# Altium PCB USV-Central Controller Board.PcbDoc (part 1 of 2)
Units mm, origin at the board's own origin, x right, y up, seen from the top; angles counter-clockwise.
Board outline 150 x 100 mm, 2 copper layers (Top Layer, Bottom Layer); 99 components, 79 nets, 371 pads, 0 vias.
Unrouted connection lines stored in the file: 190.
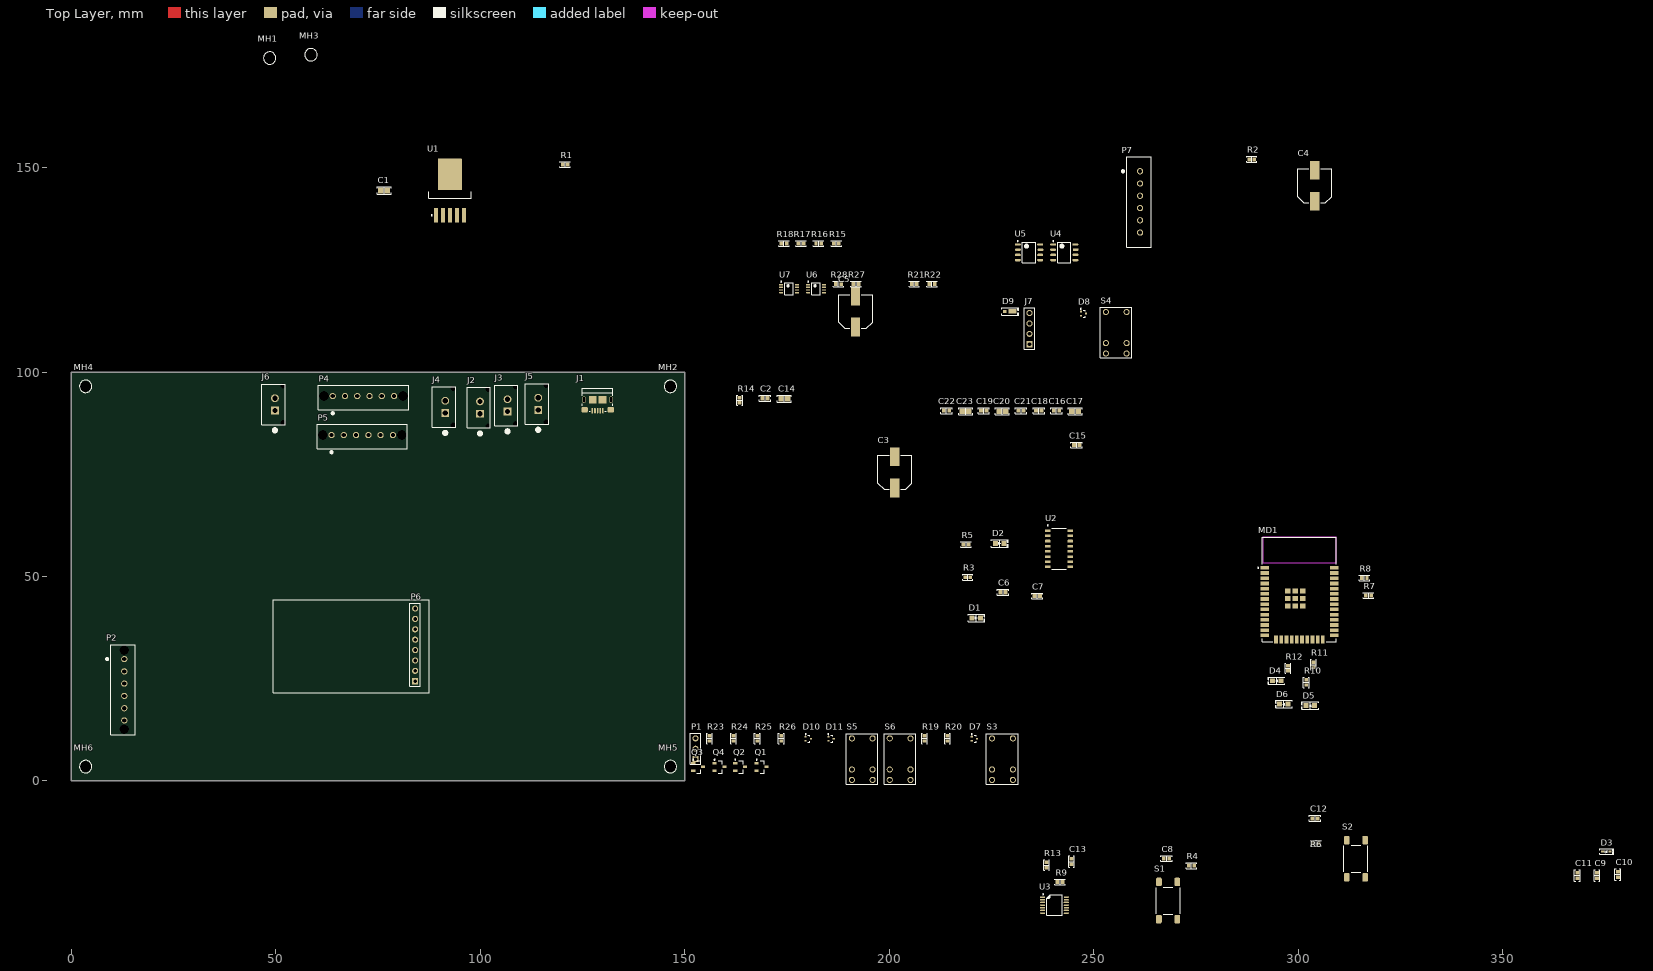
[diagram p0: Top Layer view]
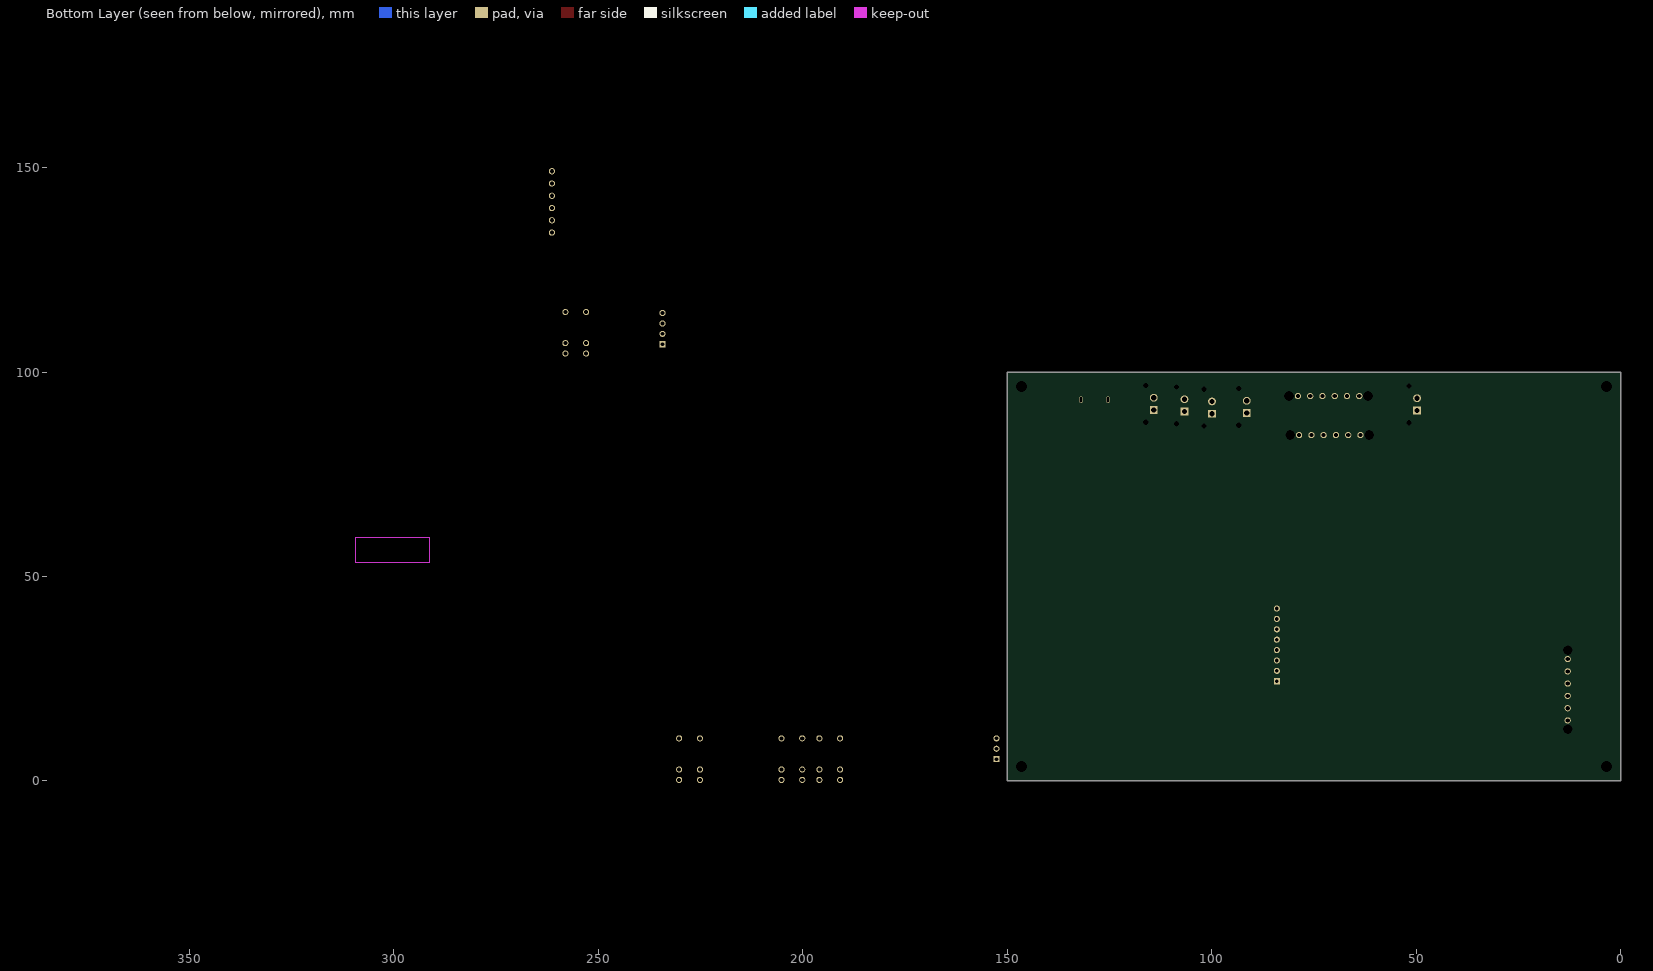
[diagram p1: Bottom Layer view, seen from below]

## Layer stack, top to bottom
Top Solder: solder mask 0.0102, Solder Resist, Dk 3.5
Top Layer: signal copper 0.0356
Dielectric 1: dielectric 0.32, FR-4, Dk 4.8
Bottom Layer: signal copper 0.0356
Bottom Solder: solder mask 0.0102, Solder Resist, Dk 3.5

## Board outline
0,0 0,100 150,100 150,0

## Design rules (kind name [scope] priority, off if disabled: settings)
Clearance [All] p1: gap=0.254 ignorepadtopadclearanceinfootprint=FALSE except(0: Arc-Hole Track-Hole SMDPad-Hole THPad-Hole Via-Hole Fill-Hole Poly-Hole Region-Hole Text-Hole)
PolygonConnect [All] p1: connectstyle=Relief reliefconductorwidth=0.254 reliefentries=4 polygonreliefangle="90 Angle" airgapwidth=0.254
RoomDefinition Microcontroller [InComponentClass('Microcontroller')] p1: confinementstyle=ConfineIn formatcopy=TRUE lockcomponents=FALSE outline 396.875,6.985 384.81,6.985 384.81,17.653 396.875,17.653
RoomDefinition U_Communication [InComponentClass('U_Communication')] p2: confinementstyle=ConfineIn formatcopy=TRUE lockcomponents=FALSE outline 256.428,130.302 356.123,130.302 356.123,155.575 256.428,155.575
RoomDefinition "U_Input Connections" [InComponentClass('U_Input Connections')] p3: confinementstyle=ConfineIn formatcopy=TRUE lockcomponents=FALSE outline -25.4,-25.4 25.4,-25.4 25.4,0 -25.4,0
RoomDefinition "U_Output Connections" [InComponentClass('U_Output Connections')] p4: confinementstyle=ConfineIn formatcopy=TRUE lockcomponents=FALSE outline -25.4,-25.4 25.4,-25.4 25.4,0 -25.4,0
RoomDefinition U_Power [InComponentClass('U_Power')] p5: confinementstyle=ConfineIn formatcopy=TRUE lockcomponents=FALSE outline 114.935,134.493 134.874,134.493 134.874,154.305 114.935,154.305
RoutingVias [All] p1: holewidth=0.711 width=1.27 viastyle="Through Hole" minholewidth=0.711 minwidth=1.27 maxholewidth=0.711 maxwidth=1.27
SolderMaskExpansion [All] p1: expansion=0.102 istentingtop=FALSE
Width [All] p1: maxlimit=0.254 minlimit=0.254 preferedwidth=0.254
30 further rules are at their usual default settings.

## Classes and differential pairs
component class U_Power: C1 C2 C14 C15 C16 C17 C18 C19 C20 C21 C22 C23 R1 R14 R15 R16 R17 R18 U1 U4 U5
component class "U_Output Connections": J2 J3 J4 J5 MH1 MH2 MH3 MH4 MH5 MH6
component class Microcontroller: C6 C7 C8 C9 C10 C11 C12 C13 D1 D2 D3 D4 D5 D6 MD1 R3 R4 R5 R6 R7 R8 R9 R10 R11 R12 R13 S1 S2 U2 U3
component class "U_Input Connections": J6
component class U_Communication: C3 C4 C5 D7 D8 D9 D10 D11 J1 J7 P1 P2 P4 P5 P6 P7 Q1 Q2 Q3 Q4 R2 R19 R20 R21 R22 R23 R24 R25 R26 R27 R28 S3 S4 S5 S6 U6 U7

## Components (designator, comment, footprint, x,y, rotation, side; value= is the part's Value field where it differs from the comment)
C1 "10 µF" "CAP 0805_2012" 76.492,144.399 r0 top
C2 "2700pF" "CAP 0603_1608" 169.672,93.599 r0 top
C3 "680 µF" "CAP ALSMD 8.3MM H10.5MM" 201.422,75.438 r90 top
C4 "680 µF" "CAP ALSMD 8.3MM H10.5MM" 304.053,145.54 r90 top
C5 "680 µF" "CAP ALSMD 8.3MM H10.5MM" 191.785,114.806 r90 top
C6 "0.1 µF" "CAP 0603_1608" 227.878,46.141 r0 top
C7 "10 µF" "CAP 0603_1608" 236.22,45.252 r0 top
C8 "1 µF" "CAP 0603_1608" 267.843,-18.938 r0 top
C9 "0.1 µF" "CAP 0603_1608" 373.126,-23.114 r270 top
C10 "10 µF" "CAP 0603_1608" 378.206,-22.86 r270 top
C11 "1 µF" "CAP 0603_1608" 368.3,-23.114 r270 top
C12 "0.1 µF" "CAP 0603_1608" 304.165,-9.144 r0 top
C13 "0.1 µF" "CAP 0603_1608" 244.602,-19.725 r90 top
C14 "10 µF" "CAP 0805_2012" 174.371,93.472 r0 top
C15 "1 µF" "CAP 0603_1608" 245.872,82.169 r0 top
C16 "1 µF" "CAP 0603_1608" 240.919,90.551 r0 top
C17 "4.7µF" "CAP 0805_2012" 245.491,90.424 r0 top
C18 "1 µF" "CAP 0603_1608" 236.601,90.551 r0 top
C19 "1 µF" "CAP 0603_1608" 223.139,90.551 r0 top
C20 "4.7µF" "CAP 0805_2012" 227.711,90.424 r0 top
C21 "1 µF" "CAP 0603_1608" 232.283,90.551 r0 top
C22 "1 µF" "CAP 0603_1608" 213.995,90.551 r0 top
C23 "4.7µF" "CAP 0805_2012" 218.694,90.424 r0 top
D1 "Green" "LED 0805_2012 GREEN" 221.327,39.878 r0 top
D2 "Red" "LED 0805_2012 RED" 227.042,58.079 r0 top
D3 "ESD3V3D5B-TP" SOD523F 375.412,-17.272 r0 top
D4 "Blue" "LED 0805_2012 BLUE" 294.767,24.511 r180 top
D5 "Red" "LED 0805_2012 RED" 302.988,18.415 r180 top
D6 "Green" "LED 0805_2012 GREEN" 296.545,18.796 r180 top
D7 "BAS116T-7-F" "DIODES SOT-523" 220.853,10.287 r0 top
D8 "BAS116T-7-F" "DIODES SOT-523" 247.538,114.298 r0 top
D9 "MSS2P3-M3/89A" "DO-219AD MicroSMP" 229.25,114.806 r0 top
D10 "BAS116T-7-F" "DIODES SOT-523" 180.213,10.287 r0 top
D11 "BAS116T-7-F" "DIODES SOT-523" 185.801,10.287 r0 top
J1 "10118193-0001LF" "FCI USB 10118193-0001LF" 128.708,93.18 r0 top locked
J2 "0436500215" 0436500215-Footprint-1 99.949,91.313 r90 top locked
J3 "0436500215" 0436500215-Footprint-1 106.68,91.846 r90 top locked
J4 "0436500215" 0436500215-Footprint-1 91.44,91.465 r90 top locked
J5 "0436500215" 0436500215-Footprint-1 114.173,92.227 r90 top locked
J6 "0436500215" 0436500215-Footprint-1 49.784,92.1 r90 top locked
J7 "Header 4" HDR1X4 234.33,106.805 r90 top
MD1 "ESP32-WROOM-32" FP-ESP32-WROOM-32-MFG 300.346,46.85 r0 top
MH1 "Mounting Hole M2.5x6mm" "Mounting Hole M2.5x6mm-Footprint-1" 48.514,176.784 r0 top
MH2 "Mounting Hole M2.5x6mm" "Mounting Hole M2.5x6mm-Footprint-1" 146.5,96.5 r0 top locked
MH3 "Mounting Hole M2.5x6mm" "Mounting Hole M2.5x6mm-Footprint-1" 58.623,177.597 r0 top
MH4 "Mounting Hole M2.5x6mm" "Mounting Hole M2.5x6mm-Footprint-1" 3.5,96.5 r0 top locked
MH5 "Mounting Hole M2.5x6mm" "Mounting Hole M2.5x6mm-Footprint-1" 146.5,3.5 r0 top locked
MH6 "Mounting Hole M2.5x6mm" "Mounting Hole M2.5x6mm-Footprint-1" 3.5,3.5 r0 top locked
P1 "Header 3" HDR1X3 152.654,5.334 r90 top
P2 "043650-0618" 043650-0618-Footprint-1 12.954,22.297 r90 top locked
P4 "043650-0618" 043650-0618-Footprint-1 71.429,94.107 r180 top locked
P5 "043650-0618" 043650-0618-Footprint-1 71.144,84.582 r180 top locked
P6 "Accelerometer Connector" HDR1X8 84.089,24.384 r90 top
P7 "043650-0618" 043650-0618-Footprint-1 261.381,141.605 r90 top
Q1 "BSS806NH6327XTSA1" SOT95P255X100-3N 168.783,3.429 r0 top
Q2 "BSS806NH6327XTSA1" SOT95P255X100-3N 163.576,3.429 r0 top
Q3 "BSS806NH6327XTSA1" SOT95P255X100-3N 153.289,3.429 r0 top
Q4 "BSS806NH6327XTSA1" SOT95P255X100-3N 158.496,3.429 r0 top
R1 "2 kOhms" "RES 0603_1608" 120.777,150.749 r0 top
R2 "0 Ohms" "RES 0603_1608" 288.686,152.019 r0 top
R3 "1 kOhms" "RES 0603_1608" 219.217,49.824 r0 top
R4 "10 kOhms" "RES 0603_1608" 273.924,-20.716 r0 top
R5 "1 kOhms" "RES 0603_1608" 218.821,57.825 r0 top
R6 "10 kOhms" "RES 0603_1608" 304.419,-15.24 r180 top
R7 "1 kOhms" "RES 0603_1608" 317.246,45.339 r0 top
R8 "1 kOhms" "RES 0603_1608" 316.215,49.657 r180 top
R9 "62 kOhms" "RES 0603_1608" 241.808,-24.725 r0 top
R10 "2 kOhms" "RES 0603_1608" 302.006,24.115 r90 top
R11 "2 kOhms" "RES 0603_1608" 303.784,28.433 r90 top
R12 "2 kOhms" "RES 0603_1608" 297.561,27.559 r270 top
R13 "100 kOhms" "RES 0603_1608" 238.506,-20.574 r90 top
R14 "357 Ohms" "RES 0603_1608" 163.449,93.091 r90 top
R15 "10 kOhms" "RES 0603_1608" 187.086,131.443 r0 top
R16 "10 kOhms" "RES 0603_1608" 182.768,131.443 r0 top
R17 "10 kOhms" "RES 0603_1608" 178.45,131.443 r0 top
R18 "10 kOhms" "RES 0603_1608" 174.259,131.443 r0 top
R19 "10 kOhms" "RES 0603_1608" 208.661,10.414 r90 top
R20 "1 kOhms" "RES 0603_1608" 214.249,10.414 r90 top
R21 "10 kOhms" "RES 0603_1608" 206.136,121.537 r0 top
R22 "1 kOhms" "RES 0603_1608" 210.454,121.537 r0 top
R23 "10 kOhms" "RES 0603_1608" 156.083,10.414 r90 top
R24 "1 kOhms" "RES 0603_1608" 161.925,10.414 r90 top
R25 "10 kOhms" "RES 0603_1608" 167.767,10.414 r90 top
R26 "1 kOhms" "RES 0603_1608" 173.609,10.414 r90 top
R27 "10 kOhms" "RES 0603_1608" 191.912,121.537 r0 top
R28 "10 kOhms" "RES 0603_1608" 187.594,121.537 r0 top
S1 "1977223-9" "TE FSM4JSMA" 268.224,-29.252 r0 top
S2 "1977223-9" "TE FSM4JSMA" 314.162,-19.028 r0 top
S3 "HY1-5V" HY1-5V-Footprint-1 225.171,10.414 r90 top
S4 "HY1-5V" HY1-5V-Footprint-1 252.999,114.679 r90 top
S5 "HY1-5V" HY1-5V-Footprint-1 190.881,10.414 r90 top
S6 "HY1-5V" HY1-5V-Footprint-1 200.152,10.414 r90 top
U1 "LP38513TJ-ADJ/NOPB" NDQ0005A_M 92.583,144.386 r90 top
U2 "CH340C" CH340C-Footprint-1 241.554,56.769 r0 top
U3 "MC74HC125ADTR2G" "ON SEMI TSSOP-14 948G" 240.432,-30.368 r0 top
U4 "AP2142ASG-13DICT-ND" SOP127P600X175-8N 242.839,129.284 r0 top
U5 "AP2142ASG-13DICT-ND" SOP127P600X175-8N 234.203,129.284 r0 top
U6 "TC7WH157FU,LJ(CT" TSOP65P400X120-8N 182.133,120.394 r0 top
U7 "TC7WH157FU,LJ(CT" TSOP65P400X120-8N 175.529,120.394 r0 top

## Footprints (in the part's own frame and the unit in brackets; to place one, negate y for a bottom-side part, rotate by r counter-clockwise, add the part's x,y. Pads: shape width x height; smd on the part's side, far side on the other; paste and mask are expansions set on the pad)
043650-0618-Footprint-1 [mm]
  round 1.524 hole 1.02: 1(7.5,0) 2(4.5,0) 3(1.5,0) 4(-1.5,0) 5(-4.5,0) 6(-7.5,0)
  round 1.524 hole 2.41: 30(-9.65,0) 30(9.65,0)
  silkscreen extent -11.05,-2.67 11.05,4.44, body extent -10.82,-2.47 10.82,3.14, height 10.03
0436500215-Footprint-1 [mil]
  rect 75x75 hole 50: 1(-59,0)
  round 75 hole 50: 2(59,0)
  round 0 hole 50: 25(-177,-77) 25(177,-77)
  silkscreen extent -265,-100 195,125, body extent -190,-97 190,123, height 399
"CAP 0603_1608" [mm] "Chip Capacitor, 2-Leads, Body 1.60x0.80mm, IPC Medium Density"
  rect 0.9x1 smd: 1(-0.675,0) 2(0.675,0)
  silkscreen extent -1.4,-0.7 1.4,0.7, body extent -0.8,-0.41 0.8,0.41, height 0.82
"CAP 0805_2012" [mm] "Chip Capacitor, 2-Leads, Body 2.00x1.20mm, IPC Medium Density"
  rect 1.3x1.4 smd: 1(-0.8,0) 2(0.8,0)
  silkscreen extent -1.7,-0.9 1.7,0.9, body extent -1,-0.64 1,0.64, height 1.26
"CAP ALSMD 8.3MM H10.5MM" [mm] "Aluminum Electrolytic Capacitor, Body 8.30x8.30x10.50mm, IPC Low Density"
  rect 4.55x2.3 smd: 1(-3.8,0) 2(3.8,0)
  silkscreen extent -4.15,-4.15 4.15,4.15, body extent -4.95,-4.15 4.95,4.15, height 10.5
CH340C-Footprint-1 [mm]
  rrect25% 1.31x0.62 smd: 1(-2.75,4.445) 2(-2.75,3.175) 3(-2.75,1.905) 4(-2.75,0.635) 5(-2.75,-0.635) 6(-2.75,-1.905) 7(-2.75,-3.175) 8(-2.75,-4.445) 9(2.75,-4.445) 10(2.75,-3.175) 11(2.75,-1.905) 12(2.75,-0.635) 13(2.75,0.635) 14(2.75,1.905) 15(2.75,3.175) 16(2.75,4.445)
  silkscreen extent -2.85,-5 1.78,5.85, body extent -3,-5 3,5, height 1.8
"DIODES SOT-523" [mm] "SOT523, 3-Leads, Body 0.8x1.60mm, Pitch 0.50mm, IPC Medium Density"
  rect 0.51x0.4 smd: 1(-0.65,0.5) 2(0.65,0) 3(-0.65,-0.5)
  silkscreen extent -0.77,-0.85 0.42,1.27, body extent -0.81,-0.8 0.81,0.8, height 0.82
"DO-219AD MicroSMP" [mm] "Molded Diode, 2-Leads, Body 2.70x1.40mm, IPC Medium Density"
  rect 0.8x0.8 smd: 1(-1,0)
  rect 2x1.1 smd: 2(0.9,0)
  silkscreen extent -1.7,-0.9 2.4,0.9, body extent -1.25,-0.65 1.25,0.65, height 0.74
"FCI USB 10118193-0001LF" [mm] "USB 2.0 Type B Micro"
  oval 0.4x1.35 smd: 1(1.3,-2.625) 2(0.65,-2.625) 3(0,-2.625) 4(-0.65,-2.625) 5(-1.3,-2.625)
  oval 0.9x1.6 hole 0.5 slot 1.2 at 90 deg: S(-3.3,0.05) S(3.3,0.05)
  rrect50% 1.6x1.4 smd: S(-3.2,-2.4) S(3.2,-2.4)
  rect 1.9x1.8 smd: S(-1.2,0.05) S(1.2,0.05)
  silkscreen extent -3.7,-2.8 3.7,2.8, body extent -3.93,-2.9 3.93,2.76, height 2.78
FP-ESP32-WROOM-32-MFG [mm]
  rect 2x0.9 smd paste+0 mask+0: 1(-8.5,5.26) 2(-8.5,3.99) 3(-8.5,2.72) 4(-8.5,1.45) 5(-8.5,0.18) 6(-8.5,-1.09) 7(-8.5,-2.36) 8(-8.5,-3.63) 9(-8.5,-4.9) 10(-8.5,-6.17) 11(-8.5,-7.44) 12(-8.5,-8.71) 13(-8.5,-9.98) 14(-8.5,-11.25) 25(8.5,-11.25) 26(8.5,-9.98) 27(8.5,-8.71) 28(8.5,-7.44) 29(8.5,-6.17) 30(8.5,-4.9) 31(8.5,-3.63) 32(8.5,-2.36) 33(8.5,-1.09) 34(8.5,0.18) 35(8.5,1.45) 36(8.5,2.72) 37(8.5,3.99) 38(8.5,5.26)
  rect 0.9x2 smd paste+0 mask+0: 15(-5.715,-12.25) 16(-4.445,-12.25) 17(-3.175,-12.25) 18(-1.905,-12.25) 19(-0.635,-12.25) 20(0.635,-12.25) 21(1.905,-12.25) 22(3.175,-12.25) 23(4.445,-12.25) 24(5.715,-12.25)
  rect 1.33x1.33 smd paste+0 mask+0: 39(-2.835,-4.075) 39(-2.835,-2.24) 39(-2.835,-0.405) 39(-1,-4.075) 39(-1,-2.24) 39(-1,-0.405) 39(0.835,-4.075) 39(0.835,-2.24) 39(0.835,-0.405)
  Keep-Out Layer region: -9,6.45 9,6.45 9,12.75 -9,12.75
  Keep-Out Layer region: -9,6.45 9,6.45 9,12.75 -9,12.75
  silkscreen extent -10.25,-12.8 9.05,12.8, body extent -9,-12.75 9,12.75, height 3.2
HDR1X3 [mm] "Connector; Header; 3 Position"
  rect 1.5x1.5 hole 0.9: 1(0,0)
  round 1.5 hole 0.9: 2(2.54,0) 3(5.08,0)
  silkscreen extent -1.27,-1.27 6.35,1.27
HDR1X4 [mm] "Connector; Header; 4 Position"
  rect 1.5x1.5 hole 0.9: 1(0,0)
  round 1.5 hole 0.9: 2(2.54,0) 3(5.08,0) 4(7.62,0)
  silkscreen extent -1.27,-1.27 8.89,1.27
HDR1X8 [mm] "Connector; Header; 8 Position"
  rect 1.5x1.5 hole 0.9: 1(0,0)
  round 1.5 hole 0.9: 2(2.54,0) 3(5.08,0) 4(7.62,0) 5(10.16,0) 6(12.7,0) 7(15.24,0) 8(17.78,0)
  silkscreen extent -1.27,-1.27 19.05,1.27
HY1-5V-Footprint-1 [mm]
  round 1.5 hole 1: 1(-10.16,0) 2(-7.62,0) 5(0,0) 6(0,-5.08) 9(-7.62,-5.08) 10(-10.16,-5.08)
  silkscreen extent -11.18,-6.35 1.14,1.4, body extent -10.82,-6.15 0.91,1.25, height 9.6
"LED 0805_2012 BLUE" [mm] "Chip Diode, 2-Leads, Body 2.00x1.25mm, IPC Medium Density"
  rect 1.2x1.2 smd: 1(-1.05,0) 2(1.05,0)
  silkscreen extent -2.03,-0.9 2.03,0.9, body extent -1,-0.62 1,0.63, height 0.9
"LED 0805_2012 GREEN" [mm] "Chip Diode, 2-Leads, Body 2.00x1.25mm, IPC Medium Density"
  rect 1.2x1.2 smd: 1(-1.05,0) 2(1.05,0)
  silkscreen extent -2.03,-0.9 2.03,0.9, body extent -1,-0.62 1,0.63, height 0.9
"LED 0805_2012 RED" [mm] "Chip Diode, 2-Leads, Body 2.00x1.25mm, IPC Medium Density"
  rect 1.2x1.2 smd: 1(-1.05,0) 2(1.05,0)
  silkscreen extent -2.03,-0.9 2.03,0.9, body extent -1,-0.62 1,0.63, height 0.9
"Mounting Hole M2.5x6mm-Footprint-1" [mil]
  round 60 hole 104.33: 0(0,0)
  silkscreen extent -60,-60 60,60, body extent -125,-125 125,125, height 217
NDQ0005A_M [mm] "D2-PAK, 6-Leads, Body 9.9x10.2mm, Pitch 1.7mm, Lead Span 14mm, IPC Low Density"
  rrect10% 3.5x1 smd: 1(-6.05,3.4) 2(-6.05,1.7) 3(-6.05,0) 4(-6.05,-1.7) 5(-6.05,-3.4)
  rrect2% 7.7x5.8 smd: 6(3.95,0)
  silkscreen extent -6.17,-5.2 -0.3,5.2, body extent -1.9,-5.2 8.2,5.2, height 2.1
"ON SEMI TSSOP-14 948G" [mm] "TSSOP, 14-Leads, Body 5.00x4.40mm, Pitch 0.65mm, IPC Medium Density"
  oval 1.26x0.36 smd: 1(-2.9,1.95) 2(-2.9,1.3) 3(-2.9,0.65) 4(-2.9,0) 5(-2.9,-0.65) 6(-2.9,-1.3) 7(-2.9,-1.95) 8(2.9,-1.95) 9(2.9,-1.3) 10(2.9,-0.65) 11(2.9,0) 12(2.9,0.65) 13(2.9,1.3) 14(2.9,1.95)
  silkscreen extent -2.92,-2.54 1.91,2.8, body extent -3.21,-2.5 3.21,2.5, height 1.2
"RES 0603_1608" [mm] "Chip Resistor, 2-Leads, Body 1.60x0.80mm, IPC Medium Density"
  rect 0.85x0.95 smd: 1(-0.65,0) 2(0.65,0)
  silkscreen extent -1.27,-0.7 1.27,0.7, body extent -0.8,-0.4 0.8,0.4, height 0.45
SOD523F [mm] "SODFL, 2-Leads, Body 0.80x1.60mm, IPC Medium Density"
  rect 0.8x0.5 smd: 1(-0.9,0) 2(0.9,0)
  silkscreen extent -1.6,-0.64 1.8,0.64, body extent -0.8,-0.4 0.8,0.4, height 0.65
SOP127P600X175-8N [mm] "SOP, 8-Leads, Body 4.90x3.90mm, Pitch 1.27mm, IPC Medium Density"
  oval 1.45x0.6 smd: 1(-2.725,1.905) 2(-2.725,0.635) 3(-2.725,-0.635) 4(-2.725,-1.905) 5(2.725,-1.905) 6(2.725,-0.635) 7(2.794,0.635) 8(2.725,1.905)
  silkscreen extent -2.85,-2.5 1.6,2.88, body extent -3.11,-2.5 3.11,2.5, height 1.87
SOT95P255X100-3N [mm] "SOT23, 3-Leads, Body 2.90x2.55mm, Pitch 0.95mm, IPC Medium Density"
  rect 1x0.6 smd: 1(-1.2,0.95) 2(-1.2,-0.95) 3(1.2,0)
  silkscreen extent -1.32,-1.5 0.7,1.92, body extent -1.3,-1.5 1.3,1.5, height 1
"TE FSM4JSMA" [mm]
  rrect50% 1.4x2.1 smd: 1(2.25,4.55) 2(2.25,-4.55) 3(-2.25,4.55) 4(-2.25,-4.55)
  silkscreen extent -2.92,-3.3 2.92,3.3, body extent -3,-5 3,5, height 5.08
TSOP65P400X120-8N [mm] "TSOP, 8-Leads, Body 2.90x2.80mm, Pitch 0.65mm, IPC Medium Density"
  oval 1x0.35 smd: 1(-1.95,0.975) 2(-1.95,0.325) 3(-1.95,-0.325) 4(-1.95,-0.975) 5(1.95,-0.975) 6(1.95,-0.325) 7(1.95,0.325) 8(1.95,0.975)
  silkscreen extent -2.07,-1.5 1.05,1.82, body extent -1.99,-1.5 1.99,1.5, height 1.2

## Part data
C1 C14: library part CGA4J1X5R1C106K125AC, "CAP CER 10UF 16V X5R 0805", Device Package="0805 (2012 Metric)", Manufacturer="TDK Corporation", Operating Temperature="-55°C ~ 85°C", Ratings=AEC-Q200, Supplier Part Number 1=445-7883-1-ND, Temperature Coefficient=X5R, Tolerance=±10%, Voltage - Rated=16V, Applications=Automotive, Capacitance="10 µF", ComponentLink1Description=Datasheet, ComponentLink1URL=https://product.tdk.com/info/en/catalog/datasheets/mlcc_automotive_general_en.pdf?ref_disty=digikey, ComponentLink2Description="DigiKey Link", ComponentLink2URL=https://www.digikey.com/en/products/detail/tdk-corporation/CGA4J1X5R1C106K125AC/2781309, LastUpdated="2022-04-02 5:58:40 AM", Lifecycle Status=Active, Minimum Order=1, Mounting Type="Surface Mount, MLCC", Package / Case="0805 (2012 Metric)", Packaging=TapeAndReel, Part Number=CGA4J1X5R1C106K125AC, Part Status=Active, PartId=3076, Price=0.09, Series=CGA, Size / Dimension="0.079\" L x 0.049\" W (2.00mm x 1.25mm)", Supplier 1=DigiKey, Thickness (Max)="0.057\" (1.45mm)"
C2: library part 06035C272KAT2A, "CAP CER 2700PF 50V X7R 0603", Device Package="0603 (1608 Metric)", Manufacturer="AVX Corporation", Operating Temperature="-55°C ~ 125°C", Supplier Part Number 1=478-1220-1-ND, Temperature Coefficient=X7R, Tolerance=±10%, Voltage - Rated=50V, Applications="General Purpose", Capacitance=2700pF, ComponentLink1Description=Datasheet, ComponentLink1URL=http://datasheets.avx.com/X7RDielectric.pdf, ComponentLink2Description="DigiKey Link", ComponentLink2URL=http://digikey.com/product-detail/en/avx-corporation/06035C272KAT2A/478-1220-1-ND/564252, LastUpdated="2020-09-02 1:03:32 AM", Lifecycle Status=Active, Minimum Order=1, Mounting Type="Surface Mount, MLCC", Package / Case="0603 (1608 Metric)", Packaging=TapeAndReel, Part Number=06035C272KAT2A, Part Status=Active, PartId=4337, Price=0.02, Series=-, Size / Dimension="0.063\" L x 0.032\" W (1.60mm x 0.81mm)", Supplier 1=DigiKey, Thickness (Max)="0.035\" (0.90mm)"
C3 C4 C5: library part EEE-FK1A681P, "CAP ALUM 680UF 20% 10V SMD", Device Package="Radial, Can - SMD", Lifetime @ Temp.="2000 Hrs @ 105°C", Manufacturer="Panasonic Electronic Components", Operating Temperature="-55°C ~ 105°C", Ratings=AEC-Q200, Ripple Current @ High Frequency="600 mA @ 100 kHz", Ripple Current @ Low Frequency="450 mA @ 120 Hz", Supplier Part Number 1=PCE3781CT-ND, Tolerance=±20%, Voltage - Rated="10 V", Applications=Automotive, Capacitance="680 µF", ComponentLink2Description="DigiKey Link", ComponentLink2URL=https://www.digikey.com/en/products/detail/panasonic-electronic-components/EEE-FK1A681P/765951, Height - Seated (Max)="0.413\" (10.50mm)", Impedance="160 mOhms", LastUpdated="3/4/2022 6:18:28 PM", Lifecycle Status=Active, Minimum Order=1, Mounting Type="Surface Mount", Package / Case="Radial, Can - SMD", Packaging=TapeAndReel, Part Number=EEE-FK1A681P, Part Status=Active, PartId=7615, Polarization=Polar, Price=0.34, Series=FK, Size / Dimension="0.315\" Dia (8.00mm)", Supplier 1=DigiKey, Surface Mount Land Size="0.327\" L x 0.327\" W (8.30mm x 8.30mm)"
C6 C9 C12 C13: library part C0603X104M3RAC7867, "CAP CER 0.1UF 25V X7R 0603", Device Package="0603 (1608 Metric)", Manufacturer=KEMET, Operating Temperature="-55°C ~ 125°C", Supplier Part Number 1=399-13148-1-ND, Temperature Coefficient=X7R, Tolerance=±20%, Voltage - Rated=25V, Applications="Boardflex Sensitive", Capacitance="0.1 µF", ComponentLink1Description=Datasheet, ComponentLink1URL=https://api.kemet.com/component-edge/download/datasheet/C0603X104M3RACTU.pdf, ComponentLink2Description="DigiKey Link", ComponentLink2URL=https://www.digikey.com/en/products/detail/kemet/C0603X104M3RAC7867/2202613, Features="Soft Termination", Lifecycle Status=Active, Minimum Order=1, Mounting Type="Surface Mount, MLCC", Package / Case="0603 (1608 Metric)", Packaging=TapeAndReel, Part Number=C0603X104M3RAC7867, Part Status=Active, PartId=2484, Price=0.07, Series="SMD Comm X7R Flex", Size / Dimension="0.063\" L x 0.031\" W (1.60mm x 0.80mm)", Supplier 1=DigiKey, Thickness (Max)="0.034\" (0.87mm)"
  C6: LastUpdated="2022-03-04 5:28:58 PM"
  C9 C12 C13: LastUpdated="2022-03-07 3:18:24 PM"
C7 C10: library part GRT188R61C106ME13D, "CAP CER 10UF 16V X5R 0603", Device Package="0603 (1608 Metric)", Manufacturer="Murata Electronics", Operating Temperature="-55°C ~ 85°C", Ratings=AEC-Q200, Supplier Part Number 1=490-12318-1-ND, Temperature Coefficient=X5R, Tolerance=±20%, Voltage - Rated=16V, Applications=Automotive, Capacitance="10 µF", ComponentLink1Description=Datasheet, ComponentLink1URL=https://search.murata.co.jp/Ceramy/image/img/A01X/G101/ENG/GRT188R61C106ME13-01.pdf, ComponentLink2Description="DigiKey Link", ComponentLink2URL=https://www.digikey.com/en/products/detail/murata-electronics/GRT188R61C106ME13D/5416740, Lifecycle Status=Active, Minimum Order=1, Mounting Type="Surface Mount, MLCC", Package / Case="0603 (1608 Metric)", Packaging=TapeAndReel, Part Number=GRT188R61C106ME13D, Part Status=Active, PartId=2515, Price=0.07, Series=GRT, Size / Dimension="0.063\" L x 0.031\" W (1.60mm x 0.80mm)", Supplier 1=DigiKey, Thickness (Max)="0.035\" (0.90mm)"
  C7: LastUpdated="2022-03-04 5:28:58 PM"
  C10: LastUpdated="2022-03-07 3:18:24 PM"
C8 C11 C15 C16 C18 C19 C21 C22: library part CM105X7R105K16ATH, "CAP CER 1UF 16V X7R 0603", Device Package="0603 (1608 Metric)", Manufacturer="KYOCERA AVX", Operating Temperature="-55°C ~ 125°C", Supplier Part Number 1=478-CM105X7R105K16ATHCT-ND, Temperature Coefficient=X7R, Tolerance=±10%, Voltage - Rated=16V, Applications="General Purpose", Capacitance="1 µF", ComponentLink1Description=Datasheet, ComponentLink1URL=https://ele.kyocera.com/assets/products/capacitor/CM_Series_e.pdf, ComponentLink2Description="DigiKey Link", ComponentLink2URL=https://www.digikey.com/en/products/detail/kyocera-avx/CM105X7R105K16ATH/10197120, LastUpdated="2022-03-07 3:17:15 PM", Lifecycle Status=Active, Minimum Order=1, Mounting Type="Surface Mount, MLCC", Package / Case="0603 (1608 Metric)", Packaging=TapeAndReel, Part Number=CM105X7R105K16ATH, Part Status=Active, PartId=34778, Price=0.03, Series=CM, Size / Dimension="0.063\" L x 0.031\" W (1.60mm x 0.80mm)", Supplier 1=DigiKey, Thickness (Max)="0.035\" (0.90mm)"
C17 C20 C23: library part 0805ZC475MAT2A, "CAP CER 4.7UF 10V X7R 0805", Device Package="0805 (2012 Metric)", Manufacturer="AVX Corporation", Operating Temperature="-55°C ~ 125°C", Supplier Part Number 1=478-7965-1-ND, Temperature Coefficient=X7R, Tolerance=±20%, Voltage - Rated=10V, Applications="General Purpose", Capacitance=4.7µF, ComponentLink1Description=Datasheet, ComponentLink1URL=http://datasheets.avx.com/X7RDielectric.pdf, ComponentLink2Description="DigiKey Link", ComponentLink2URL=http://digikey.com/product-detail/en/avx-corporation/0805ZC475MAT2A/478-7965-1-ND/3881588, LastUpdated="2020-09-02 1:04:25 AM", Lifecycle Status=Active, Minimum Order=1, Mounting Type="Surface Mount, MLCC", Package / Case="0805 (2012 Metric)", Packaging=TapeAndReel, Part Number=0805ZC475MAT2A, Part Status=Active, PartId=11941, Price=0.29, Series=-, Size / Dimension="0.079\" L x 0.049\" W (2.00mm x 1.25mm)", Supplier 1=DigiKey, Thickness (Max)="0.060\" (1.52mm)"
D1 D6: library part XZVG54W-1, "LED GREEN CLEAR CHIP SMD", Current - Test=20mA, Device Package="0805 (2012 Metric)", Lens Color=Colorless, Manufacturer=SunLED, Millicandela Rating=49mcd, Supplier Device Package="Chip LED", Supplier Part Number 1=1497-1216-1-ND, Voltage - Forward (Vf) (Typ)=2.1V, Color=Green, ComponentLink1Description=Datasheet, ComponentLink1URL=https://www.sunledusa.com/products/spec/XZVG54W-1.pdf, ComponentLink2Description="DigiKey Link", ComponentLink2URL=https://www.digikey.com/en/products/detail/sunled/XZVG54W-1/4745972, Configuration=Standard, Height (Max)=0.85mm, Lens Size="1.20mm x 1.25mm", Lens Style="Rectangle with Flat Top", Lens Transparency=Clear, Lifecycle Status=Active, Minimum Order=1, Mounting Type="Surface Mount", Package / Case="0805 (2012 Metric)", Packaging=TapeAndReel, Part Number=XZVG54W-1, Part Status=Active, PartId=267, Price=0.05, Series=-, Size / Dimension="2.00mm L x 1.25mm W", Supplier 1=DigiKey, Viewing Angle=120°, Wavelength - Dominant=570nm, Wavelength - Peak=574nm
  D1: LastUpdated="2022-03-04 6:10:39 PM"
  D6: LastUpdated="2022-03-07 3:58:15 PM"
D2 D5: library part XZUR54W-1, "LED RED CLEAR CHIP SMD", Current - Test=20mA, Device Package="0805 (2012 Metric)", Lens Color=Colorless, Manufacturer=SunLED, Millicandela Rating=7mcd, Supplier Device Package="Chip LED", Supplier Part Number 1=1497-1208-1-ND, Voltage - Forward (Vf) (Typ)=2V, Color=Red, ComponentLink1Description=Datasheet, ComponentLink1URL=https://www.sunledusa.com/products/spec/XZUR54W-1.pdf, ComponentLink2Description="DigiKey Link", ComponentLink2URL=https://www.digikey.com/en/products/detail/sunled/XZUR54W-1/4745810, Configuration=Standard, Height (Max)=0.75mm, Lens Size="1.20mm x 1.25mm", Lens Style="Rectangle with Flat Top", Lens Transparency=Clear, Lifecycle Status=Active, Minimum Order=1, Mounting Type="Surface Mount", Package / Case="0805 (2012 Metric)", Packaging=TapeAndReel, Part Number=XZUR54W-1, Part Status=Active, PartId=362, Price=0.05, Series=-, Size / Dimension="2.00mm L x 1.25mm W", Supplier 1=DigiKey, Viewing Angle=120°, Wavelength - Dominant=617nm, Wavelength - Peak=627nm
  D2: LastUpdated="2022-03-04 6:10:33 PM"
  D5: LastUpdated="2022-03-07 3:58:09 PM"
D3: "TVS DIODE 3.3VWM 12VC SOD523", Capacitance @ Frequency="16pF @ 1MHz", Current - Peak Pulse (10/1000µs)="8A (8/20µs)", Manufacturer="Micro Commercial Co", Operating Temperature="-55°C ~ 125°C (TJ)", Package / Case="SC-79, SOD-523", Power - Peak Pulse=96W, Power Line Protection=No, Supplier Device Package=SOD-523, Supplier Part Number 1=ESD3V3D5B-TPMSCT-ND, Voltage - Breakdown (Min)=4.2V, Voltage - Clamping (Max) @ Ipp=12V, Voltage - Reverse Standoff (Typ)="3.3V (Max)", Applications="General Purpose", Bidirectional Channels=1, ComponentLink1Description=Datasheet, ComponentLink1URL=https://www.mccsemi.com/pdf/Products/ESD3V3D5B(SOD-523)-A.pdf, ComponentLink2Description="DigiKey Link", ComponentLink2URL=https://www.digikey.com/en/products/detail/micro-commercial-co/ESD3V3D5B-TP/7681821, LastUpdated="2022-03-07 4:10:21 PM", Lifecycle Status=Active, Minimum Order=1, Mounting Type="Surface Mount", Packaging=TapeAndReel, Part Number=ESD3V3D5B-TP, Part Status=Active, PartId=9815, Price=0.09, Series=-, Supplier 1=DigiKey, Type=Zener
D4: library part XZCBD54W-1, "LED BLUE CLEAR CHIP SMD", Current - Test=20mA, Device Package="0805 (2012 Metric)", Lens Color=Colorless, Manufacturer=SunLED, Millicandela Rating=98mcd, Supplier Device Package="Chip LED", Supplier Part Number 1=1497-1118-1-ND, Voltage - Forward (Vf) (Typ)=3.3V, Color=Blue, ComponentLink1Description=Datasheet, ComponentLink1URL=https://www.sunledusa.com/products/spec/XZCBD54W-1.pdf, ComponentLink2Description="DigiKey Link", ComponentLink2URL=https://www.digikey.com/en/products/detail/sunled/XZCBD54W-1/4745948, Configuration=Standard, Height (Max)=0.75mm, LastUpdated="2022-03-07 3:57:35 PM", Lens Size="1.20mm x 1.25mm", Lens Style="Rectangle with Flat Top", Lens Transparency=Clear, Lifecycle Status=Active, Minimum Order=1, Mounting Type="Surface Mount", Package / Case="0805 (2012 Metric)", Packaging=TapeAndReel, Part Number=XZCBD54W-1, Part Status=Active, PartId=771, Price=0.08, Series=-, Size / Dimension="2.00mm L x 1.25mm W", Supplier 1=DigiKey, Viewing Angle=120°, Wavelength - Dominant=465nm, Wavelength - Peak=460nm
D7 D8 D10 D11: "DIODE GEN PURP 85V 215MA SOT523", Current - Average Rectified (Io)="215mA (DC)", Current - Reverse Leakage @ Vr="5nA @ 75V", Manufacturer="Diodes Incorporated", Operating Temperature - Junction="-65°C ~ 150°C", Package / Case=SOT-523, Supplier Part Number 1=BAS116T-FDICT-ND, Voltage - DC Reverse (Vr) (Max)=85V, Voltage - Forward (Vf) (Max) @ If="1.25V @ 150mA", ComponentLink1Description=Datasheet, ComponentLink1URL=https://www.diodes.com/assets/Datasheets/ds30258.pdf, ComponentLink2Description="DigiKey Link", ComponentLink2URL=http://digikey.com/product-detail/en/diodes-incorporated/BAS116T-7-F/BAS116T-FDICT-ND/815338, Diode Type=Standard, LastUpdated="4/12/2022 10:52:55 PM", Lifecycle Status=Active, Minimum Order=1, Mounting Type="Surface Mount", Packaging=TapeAndReel, Part Number=BAS116T-7-F, Part Status=Active, PartId=1, Price=0.06, Reverse Recovery Time (trr)=3µs, Series=-, Speed="Standard Recovery >500ns, > 200mA (Io)", Supplier 1=DigiKey, Supplier Device Package=SOT-523
D9: "DIODE SCHOTTKY 30V 2A MICROSMP", Capacitance @ Vr, F="65pF @ 4V, 1MHz", Current - Average Rectified (Io)=2A, Current - Reverse Leakage @ Vr="250µA @ 30V", Manufacturer="Vishay Semiconductor Diodes Division", Operating Temperature - Junction="-55°C ~ 150°C", Package / Case=DO-219AD, Supplier Device Package="MicroSMP (DO-219AD)", Supplier Part Number 1=MSS2P3-M3/89AGICT-ND, Voltage - DC Reverse (Vr) (Max)=30V, Voltage - Forward (Vf) (Max) @ If="600mV @ 2A", ComponentLink1Description=Datasheet, ComponentLink1URL=http://www.vishay.com/docs/89054/mss2p3.pdf, ComponentLink2Description="DigiKey Link", ComponentLink2URL=http://digikey.com/product-detail/en/vishay-semiconductor-diodes-division/MSS2P3-M3-89A/MSS2P3-M3-89AGICT-ND/2356594, Diode Type=Schottky, LastUpdated="2022-03-07 4:01:11 PM", Lifecycle Status=Active, Minimum Order=1, Mounting Type="Surface Mount", Packaging=TapeAndReel, Part Number=MSS2P3-M3/89A, Part Status=Active, PartId=1337, Price=0.07, Series=eSMP®, Speed="Fast Recovery =< 500ns, > 200mA (Io)", Supplier 1=DigiKey
J1: "CONN RCPT USB2.0 MICRO B SMD R/A", Current Rating (Amps)="1.8A per Contact", Manufacturer="Amphenol ICC (FCI)", Operating Temperature="-30°C ~ 80°C", Supplier Part Number 1=609-4616-2-ND, Voltage - Rated=100VAC, ComponentLink1Description=Datasheet, ComponentLink1URL=https://cdn.amphenol-icc.com/media/wysiwyg/files/documentation/datasheet/inputoutput/io_usb_micro.pdf, ComponentLink2Description="DigiKey Link", ComponentLink2URL=//digikey.com/product-detail/en/amphenol-icc-fci/10118193-0001LF/609-4616-2-ND/2785388, Connector Type="USB - micro B", Features="Solder Retention", Gender=Receptacle, LastUpdated="2019-12-09 8:51:28 PM", Lifecycle Status=0, Mating Cycles=10000, Minimum Order=1, Mounting Feature=Horizontal, Mounting Type="Surface Mount, Right Angle; Through Hole", Number of Contacts=5, Number of Ports=1, Packaging=TapeAndReel, Part Number=10118193-0001LF, Part Status=Active, Price=0.21, Series=-, Shielding=Shielded, Specifications="USB 2.0", Supplier 1=DigiKey, Termination=Solder
J2 J3 J4 J5 J6: library part CMP-00008-2, "Header 1 Row Vertical Polarizing Peg 2 Pin SMT/Glow Wire Compatible Tin Plate", Color=Black, Contact Resistance=30mR, Max Operating Temperature=105°C, Max Voltage Rating (AC)=250V, Min Operating Temperature=-40°C, Connector Type="Male Pin", Contact Material=Brass, Contact Plating=Tin, Contact Type="Male Pin", Depth=5.57mm, Fastening Type=Ramp, Housing Color=Black, Housing Material=Polymer, Length=9.65mm, Max Voltage Rating (DC)=250V, Mount="Through Hole", Number of Contacts=2, Number of Ports=1, Number of Positions=2, Number of Rows=1, Number of Terminals/Pins=2, Orientation=Straight, Packaging=Tray, Pitch=3mm, RoHS Compliant=Yes, Series="Micro-Fit 3.0™ 43650", Termination=Solder
J7: "Header, 4-Pin", LatestRevisionDate=17-Jul-2002, LatestRevisionNote="Re-released for DXP Platform.", Publisher="Altium Limited"
MD1: library part CMP-194065-000008-1, "RX TXRX MOD WIFI SURFACE MOUNT", Case/Package=SMD/SMT, Frequency=2.5GHz, Max Operating Temperature=85°C, Min Operating Temperature=-40°C, Operating Supply Voltage=3.6V, Package Quantity=550, Data Rate=150Mbps, Mount="Surface Mount", Packaging="Cut Tape", Sensitivity=-98dBm, Weight=0.088185oz
MH1 MH2 MH3 MH4 MH5 MH6: library part CMP-00006-5, "M2.5 Mounting Hole"
P1: "Header, 3-Pin", LatestRevisionDate=17-Jul-2002, LatestRevisionNote="Re-released for DXP Platform.", Publisher="Altium Limited"
P2 P4 P5 P7: library part CMP-00026-1, "Conn Power HDR 6 POS 3mm Solder ST Thru-Hole 6 Terminal 1 Port Micro-Fit 3.0™ Tray", Color=Black, Max Operating Temperature=105°C, Min Operating Temperature=-40°C, Package Quantity=1530, Connector Type="Male Pin", Contact Material=Brass, Contact Plating=Tin, Depth=5.57mm, Fastening Type=Ramp, Housing Material=Polymer, Length=21.64mm, Mount="Through Hole", Number of Contacts=6, Number of Ports=1, Number of Positions=6, Number of Rows=1, Number of Terminals/Pins=6, Orientation=Straight, Packaging=Tray, Pitch=3mm, RoHS Compliant=Yes, Termination=Solder
P6: library part "Header 8", "Header, 8-Pin", LatestRevisionDate=17-Jul-2002, LatestRevisionNote="Re-released for DXP Platform.", Publisher="Altium Limited"
Q1 Q2 Q3 Q4: library part CMP-00034-3, "Single N-Channel 20 V 57 mOhm 1.7 nC OptiMOS Small Signal Mosfet - SOT-23", Case/Package=SOT-23, Continuous Drain Current (ID)=2.3A, Drain to Source Voltage (Vdss)=20V, Gate to Source Voltage (Vgs)=8V, Input Capacitance=529pF, Max Operating Temperature=150°C, Max Power Dissipation=500mW, Min Operating Temperature=-55°C, Halogen Free="Halogen Free", Lead Free="Lead Free", Max Dual Supply Voltage=20V, Mount="Surface Mount", Packaging="Cut Tape", Rds On Max=57mR, Rise Time=9.9ns, RoHS Compliant=Yes, Series=OptiMOS™
R1 R10 R11 R12: library part RMCF0603FT2K00, "RES 2K OHM 1% 1/10W 0603", Device Package="0603 (1608 Metric)", Manufacturer="Stackpole Electronics Inc", Operating Temperature="-55°C ~ 155°C", Power (Watts)="0.1W, 1/10W", Ratings=AEC-Q200, Supplier Device Package=0603, Supplier Part Number 1=RMCF0603FT2K00CT-ND, Temperature Coefficient=±100ppm/°C, Tolerance=±1%, ComponentLink1Description=Datasheet, ComponentLink1URL=https://www.seielect.com/catalog/sei-rmcf_rmcp.pdf, ComponentLink2Description="DigiKey Link", ComponentLink2URL=https://www.digikey.com/en/products/detail/stackpole-electronics-inc/RMCF0603FT2K00/1761334, Composition="Thick Film", Features="Automotive AEC-Q200", Height - Seated (Max)="0.022\" (0.55mm)", Lifecycle Status=Active, Minimum Order=1, Number of Terminations=2, Package / Case="0603 (1608 Metric)", Packaging=CutTape, Part Number=RMCF0603FT2K00, Part Status=Active, PartId=6085, Price=0.01, Resistance="2 kOhms", Series=RMCF, Size / Dimension="0.061\" L x 0.031\" W (1.55mm x 0.80mm)", Supplier 1=DigiKey
  R1: LastUpdated="2022-04-02 6:14:17 AM"
  R10 R11 R12: LastUpdated="2022-03-07 3:35:54 PM"
R2: library part CRCW06030000Z0EBC, "RES 0 OHM JUMPER 1/10W 0603", Device Package="0603 (1608 Metric)", Manufacturer="Vishay Dale", Operating Temperature="-55°C ~ 155°C", Power (Watts)="0.1W, 1/10W", Supplier Device Package=0603, Supplier Part Number 1=541-4013-1-ND, Tolerance=Jumper, ComponentLink1Description=Datasheet, ComponentLink1URL=http://www.vishay.com/docs/28773/crcwce3.pdf, ComponentLink2Description="DigiKey Link", ComponentLink2URL=https://www.digikey.com/en/products/detail/vishay-dale/CRCW06030000Z0EBC/7928435, Composition="Thick Film", Height - Seated (Max)="0.022\" (0.55mm)", LastUpdated="2022-03-04 5:47:09 PM", Lifecycle Status=Active, Minimum Order=1, Number of Terminations=2, Package / Case="0603 (1608 Metric)", Packaging=CutTape, Part Number=CRCW06030000Z0EBC, Part Status=Active, PartId=6257, Price=0.01, Resistance="0 Ohms", Series=CRCW-C, Supplier 1=DigiKey
R3 R5 R7 R8: library part CRCW06031K00FKEB, "RES SMD 1K OHM 1% 1/10W 0603", Device Package="0603 (1608 Metric)", Manufacturer="Vishay Dale", Operating Temperature="-55°C ~ 155°C", Power (Watts)="0.1W, 1/10W", Ratings=AEC-Q200, Supplier Device Package=0603, Supplier Part Number 1=541-2985-1-ND, Temperature Coefficient=±100ppm/°C, Tolerance=±1%, ComponentLink1Description=Datasheet, ComponentLink1URL=http://www.vishay.com/docs/20035/dcrcwe3.pdf, ComponentLink2Description="DigiKey Link", ComponentLink2URL=http://digikey.com/product-detail/en/vishay-dale/CRCW06031K00FKEB/541-2985-1-ND/6073628, Composition="Thick Film", Features="Automotive AEC-Q200", Height - Seated (Max)="0.020\" (0.50mm)", Lifecycle Status=Active, Minimum Order=1, Number of Terminations=2, Package / Case="0603 (1608 Metric)", Packaging=CutTape, Part Number=CRCW06031K00FKEB, Part Status=Active, PartId=5123, Price=0.10, Resistance="1 kOhms", Series=CRCW, Size / Dimension="0.063\" L x 0.033\" W (1.60mm x 0.85mm)", Supplier 1=DigiKey
  R3 R5: LastUpdated="2022-03-04 5:47:13 PM"
  R7 R8: LastUpdated="2022-03-31 9:04:57 AM"
R4 R6 R15 R16 R17 R18 R27 R28: library part RT0603FRE0710KL, "RES SMD 10K OHM 1% 1/10W 0603", Device Package="0603 (1608 Metric)", Manufacturer=Yageo, Operating Temperature="-55°C ~ 155°C", Power (Watts)="0.1W, 1/10W", Supplier Device Package=0603, Supplier Part Number 1=YAG2321CT-ND, Temperature Coefficient=±50ppm/°C, Tolerance=±1%, ComponentLink1Description=Datasheet, ComponentLink1URL=https://www.yageo.com/upload/media/product/productsearch/datasheet/rchip/PYu-RT_1-to-0.01_RoHS_L_11.pdf, ComponentLink2Description="DigiKey Link", ComponentLink2URL=http://digikey.com/product-detail/en/yageo/RT0603FRE0710KL/YAG2321CT-ND/5252435, Composition="Thin Film", Height - Seated (Max)="0.022\" (0.55mm)", LastUpdated="2022-03-07 3:35:56 PM", Lifecycle Status=Active, Minimum Order=1, Number of Terminations=2, Package / Case="0603 (1608 Metric)", Packaging=TapeAndReel, Part Number=RT0603FRE0710KL, Part Status=Active, PartId=5671, Price=0.01, Resistance="10 kOhms", Series=RT, Size / Dimension="0.063\" L x 0.031\" W (1.60mm x 0.80mm)", Supplier 1=DigiKey
R9: library part RMCF0603FT62K0, "RES 62K OHM 1% 1/10W 0603", Device Package="0603 (1608 Metric)", Manufacturer="Stackpole Electronics Inc", Operating Temperature="-55°C ~ 155°C", Power (Watts)="0.1W, 1/10W", Ratings=AEC-Q200, Supplier Device Package=0603, Supplier Part Number 1=RMCF0603FT62K0CT-ND, Temperature Coefficient=±100ppm/°C, Tolerance=±1%, ComponentLink1Description=Datasheet, ComponentLink1URL=https://www.seielect.com/catalog/sei-rmcf_rmcp.pdf, ComponentLink2Description="DigiKey Link", ComponentLink2URL=https://www.digikey.com/en/products/detail/stackpole-electronics-inc/RMCF0603FT62K0/1714175, Composition="Thick Film", Features="Automotive AEC-Q200", Height - Seated (Max)="0.022\" (0.55mm)", LastUpdated="2022-03-31 9:04:38 AM", Lifecycle Status=Active, Minimum Order=1, Number of Terminations=2, Package / Case="0603 (1608 Metric)", Packaging=CutTape, Part Number=RMCF0603FT62K0, Part Status=Active, PartId=10723, Price=0.01, Resistance="62 kOhms", Series=RMCF, Size / Dimension="0.061\" L x 0.031\" W (1.55mm x 0.80mm)", Supplier 1=DigiKey
R13: library part RCS0603100KFKEA, "RES SMD 100K OHM 1% 1/4W 0603", Device Package="0603 (1608 Metric)", Manufacturer="Vishay Dale", Operating Temperature="-55°C ~ 155°C", Power (Watts)="0.25W, 1/4W", Ratings=AEC-Q200, Supplier Device Package=0603, Supplier Part Number 1=541-2800-1-ND, Temperature Coefficient=±100ppm/°C, Tolerance=±1%, ComponentLink1Description=Datasheet, ComponentLink1URL=http://www.vishay.com/docs/20065/rcse3.pdf, ComponentLink2Description="DigiKey Link", ComponentLink2URL=https://www.digikey.com/en/products/detail/vishay-dale/RCS0603100KFKEA/5866946, Composition="Thick Film", Features="Automotive AEC-Q200, Pulse Withstanding", Height - Seated (Max)="0.020\" (0.50mm)", LastUpdated="2022-03-07 3:35:57 PM", Lifecycle Status=Active, Minimum Order=1, Number of Terminations=2, Package / Case="0603 (1608 Metric)", Packaging=TapeAndReel, Part Number=RCS0603100KFKEA, Part Status=Active, PartId=5363, Price=0.02, Resistance="100 kOhms", Series="RCS e3", Size / Dimension="0.061\" L x 0.033\" W (1.55mm x 0.85mm)", Supplier 1=DigiKey
R14: library part RK73H1JTTD3570F, "RES 357 OHM 1% 1/8W 0603", Device Package="0603 (1608 Metric)", Manufacturer="KOA Speer Electronics, Inc.", Operating Temperature="-55°C ~ 155°C", Power (Watts)="0.125W, 1/8W", Ratings=AEC-Q200, Supplier Device Package=0603, Supplier Part Number 1=2019-RK73H1JTTD3570FCT-ND, Temperature Coefficient=±100ppm/°C, Tolerance=±1%, ComponentLink1Description=Datasheet, ComponentLink1URL=http://www.koaspeer.com/catimages/Products/RK73H/RK73H.pdf, ComponentLink2Description="DigiKey Link", ComponentLink2URL=http://digikey.com/product-detail/en/koa-speer-electronics-inc/RK73H1JTTD3570F/2019-RK73H1JTTD3570FCT-ND/9847289, Composition="Thick Film", Features="Automotive AEC-Q200, Moisture Resistant", Height - Seated (Max)="0.022\" (0.55mm)", LastUpdated="2022-04-02 6:14:08 AM", Lifecycle Status=Active, Minimum Order=1, Number of Terminations=2, Package / Case="0603 (1608 Metric)", Packaging=CutTape, Part Number=RK73H1JTTD3570F, Part Status=Active, PartId=8801, Price=0.10, Resistance="357 Ohms", Series=RK73H, Size / Dimension="0.063\" L x 0.031\" W (1.60mm x 0.80mm)", Supplier 1=DigiKey
R19 R21 R23 R25: library part RNCS0603BKE10K0, "RES 10K OHM 0.1% 1/16W 0603", Device Package="0603 (1608 Metric)", Manufacturer="Stackpole Electronics Inc", Operating Temperature="-55°C ~ 155°C", Power (Watts)="0.063W, 1/16W", Ratings=AEC-Q200, Supplier Device Package=0603, Supplier Part Number 1=RNCS0603BKE10K0CT-ND, Temperature Coefficient=±25ppm/°C, Tolerance=±0.1%, ComponentLink1Description=Datasheet, ComponentLink1URL=https://www.seielect.com/catalog/sei-rncs_rnch.pdf, ComponentLink2Description="DigiKey Link", ComponentLink2URL=https://www.digikey.com/en/products/detail/stackpole-electronics-inc/RNCS0603BKE10K0/1708836, Composition="Thin Film", Features="Anti-Corrosive, Automotive AEC-Q200, Moisture Resistant", Height - Seated (Max)="0.022\" (0.55mm)", LastUpdated="4/12/2022 10:27:55 PM", Lifecycle Status=Active, Minimum Order=1, Number of Terminations=2, Package / Case="0603 (1608 Metric)", Packaging=TapeAndReel, Part Number=RNCS0603BKE10K0, Part Status=Active, PartId=4838, Price=0.08, Resistance="10 kOhms", Series=RNCS, Size / Dimension="0.061\" L x 0.031\" W (1.55mm x 0.80mm)", Supplier 1=DigiKey
R20 R22 R24 R26: library part RNCS0603BKE10K0, "RES 10K OHM 0.1% 1/16W 0603", Device Package="0603 (1608 Metric)", Manufacturer="Stackpole Electronics Inc", Operating Temperature="-55°C ~ 155°C", Power (Watts)="0.063W, 1/16W", Ratings=AEC-Q200, Resistance="10 kOhms", Supplier Device Package=0603, Supplier Part Number 1=RNCS0603BKE10K0CT-ND, Temperature Coefficient=±25ppm/°C, Tolerance=±0.1%, ComponentLink1Description=Datasheet, ComponentLink1URL=https://www.seielect.com/catalog/sei-rncs_rnch.pdf, ComponentLink2Description="DigiKey Link", ComponentLink2URL=https://www.digikey.com/en/products/detail/stackpole-electronics-inc/RNCS0603BKE10K0/1708836, Composition="Thin Film", Features="Anti-Corrosive, Automotive AEC-Q200, Moisture Resistant", Height - Seated (Max)="0.022\" (0.55mm)", LastUpdated="4/12/2022 10:27:55 PM", Lifecycle Status=Active, Minimum Order=1, Number of Terminations=2, Package / Case="0603 (1608 Metric)", Packaging=TapeAndReel, Part Number=RNCS0603BKE10K0, Part Status=Active, PartId=4838, Price=0.08, Series=RNCS, Size / Dimension="0.061\" L x 0.031\" W (1.55mm x 0.80mm)", Supplier 1=DigiKey
S1 S2: "SWITCH TACTILE SPST-NO 0.05A 24V", Contact Rating @ Voltage="0.05A @ 24VDC", Manufacturer="TE Connectivity ALCOSWITCH Switches", Operating Force=160gf, Supplier Part Number 1=1977223-9-ND, Actuator Height off PCB, Vertical=5.00mm, Actuator Orientation="Top Actuated", Actuator Type=Standard, Circuit=SPST-NO, ComponentLink1Description=Datasheet, ComponentLink1URL=https://www.te.com/commerce/DocumentDelivery/DDEController?Action=srchrtrv&DocNm=1308111-1_SWITCHES_CORE_PROGRAM_CATALOG&DocType=CS&DocLang=English, ComponentLink2Description="DigiKey Link", ComponentLink2URL=http://digikey.com/product-detail/en/te-connectivity-alcoswitch-switches/1977223-9/1977223-9-ND/5597033, Illumination=Non-Illuminated, LastUpdated="2020-08-30 9:06:45 PM", Lifecycle Status=Active, Minimum Order=30000, Mounting Type="Surface Mount", Outline="6.00mm x 6.00mm", Packaging=Bulk, Part Number=1977223-9, Price=0.16, Series=FSMJSMA, Supplier 1=DigiKey, Switch Function=Off-Mom, Termination Style="Gull Wing"
S3 S4 S5 S6: library part CMP-00035-2, "Electromechanical Relay SPDT 1A 5VDC 166Ohm Through Hole", Case/Package=DIP, Coil Current=30.1mA, Coil Power=150mW, Coil Resistance=166R, Coil Voltage (DC)=5V, Contact Current Rating=1A, Max Operating Temperature=70°C, Max Voltage Rating (DC)=60V, Min Operating Temperature=-40°C, Package Quantity=50, Coil Type=Non-Latching, Contact Material=Gold,Silver, Depth=7.4mm, Lead Free="Lead Free", Length=12mm, Max Current Rating=1A, Mount="Through Hole", Number of Pins=6, Operate Time=5ms, Packaging=Rail/Tube, Power Consumption=150mW, Radiation Hardening=No, Relay Type=Telecom, Release Time=4ms, RoHS Compliant=Yes, Series=HY, Termination="PC Pin", Throw Configuration=SPDT, Voltage Rating (DC)=60V, Weight=1.8g
U1: library part CMP-0062-00087-3, "3A Fast-Transient Response Adjustable Low-Dropout Linear Voltage Regulator, 5-pin TO-263 Thin, Pb-Free", Manufacturer="Texas Instruments", PackageTopMarking=NSUZXYTTE#*LP38513*TJ-ADJ, PowerWise=N, ComponentLink1Description="Datasheet URL", ComponentLink1URL=http://www.ti.com/general/docs/lit/getliterature.tsp?genericPartNumber=LP38513-ADJ&fileType=pdf, CompType="LDO IC", PackageDescription="Thin TO-263, Molded, 9.85 x 10.16 x 2mm Body, 5 Lead, 1.7mm Pitch, Surface Mount", PackageReference=NDQ0005A, PinCount=5, RoHS=Y
U2: library part CMP-00015-1, "Transceiver 2Mbps USB 2.0 SOP-16_150mil USB ICs ROHS", LCSC Part Number=C84681, Created By="Miguel Manguerra", Datasheet Link=https://datasheet.lcsc.com/lcsc/2008191806_WCH-Jiangsu-Qin-Heng-CH340C_C84681.pdf, Date Created="January 11, 2022"
U3: "IC BUFFER NON-INVERT 6V 14TSSOP", Current - Output High, Low="7.8mA, 7.8mA", Device Package="14-TSSOP (0.173\", 4.40mm Width)", Manufacturer="ON Semiconductor", Operating Temperature="-55°C ~ 125°C (TA)", Supplier Device Package=14-TSSOP, Supplier Part Number 1=MC74HC125ADTR2GOSTR-ND, Voltage - Supply="2V ~ 6V", ComponentLink1Description=Datasheet, ComponentLink1URL=http://www.onsemi.com/pub/Collateral/MC74HC125A-D.PDF, ComponentLink2Description="DigiKey Link", ComponentLink2URL=//digikey.com/product-detail/en/on-semiconductor/MC74HC125ADTR2G/MC74HC125ADTR2GOSTR-ND/1479843, LastUpdated="2019-12-03 12:20:35 AM", Lifecycle Status=0, Logic Type="Buffer, Non-Inverting", Minimum Order=1, Mounting Type="Surface Mount", Number of Bits per Element=1, Number of Elements=4, Output Type=3-State, Package / Case="14-TSSOP (0.173\", 4.40mm Width)", Packaging=TapeAndReel, Part Number=MC74HC125ADTR2G, Part Status=Active, PartId=1, Price=0.11, Series=74HC, Supplier 1=DigiKey
U4 U5: library part CMP-00033-7, "AP2142A Series 5.5 V 0.5 A Dual Channel Current-Limited Power Switch - SOIC-8", Case/Package=SO, Max Operating Temperature=85°C, Max Output Current=500mA, Max Supply Voltage=5.5V, Min Operating Temperature=-40°C, Min Supply Voltage=2.7V, On-State Resistance=130mR, Package Quantity=2500, Fault Protection="Over Temperature,Reverse Current", Interface=On/Off, Mount="Surface Mount", Number of Outputs=2, Number of Pins=8, Number of Switches=2, Output Configuration="High Side", Packaging="Tape and Reel", Radiation Hardening=No, REACH SVHC="No SVHC", RoHS Compliant=Yes, Series=-, Weight=0.00261oz
U6 U7: library part CMP-00031-2, "Multiplexer 1-Element CMOS 2-IN 8-Pin SSOP T/R", High Level Output Current=8mA, Max Operating Temperature=85°C, Min Operating Temperature=-40°C, Independent Circuits=1, Low Level Output Current=8mA, Mount="Surface Mount", Packaging="Tape and Reel", RoHS Compliant=No, Supply Type=Single

## Nets (pads, with @x,y where several pads share a name; then routed paths per layer and width w, separated by ;. In a path a pad name is that pad's centre, name@x,y a point inside that pad or via, vN(x,y) a via of type N, cw(c..) or ccw(c..) an arc to the next point about the centre after c; other vN are vias at no path point)
"5 VOLT OUTPUT": U3.6
+3V3: C6.2 C7.2 C9.2 C10.2 C11.2 C13.2 D3.2 MD1.2 R3.2 R4.2 R5.2 R6.2 R7.2 R8.2 U2.16 U3.14
+3V3_ACC: C23.2 P6.1 U5.6
+3V3_GPS: P7.5
+3V3_INT: C2.2 C14.2 R1.2 U1.4
+3V3V_GPS: C17.2 U5.7
+5V: C1.2 C18.1 C21.1 D9.2 J6.2 R2.2 R9.2 R15.2 R16.2 R17.2 R18.2 S3.2 S4.2 S5.2 S6.2 U1.1 U1.2 U4.2 U5.2 U6.8 U7.8
+5V_HULL: C20.2 P4.1 P5.1 U4.6
+5V_LIDAR: C3.1 C4.1 C5.1 P2.1 U4.7
BLUE_INT: MD1.21 R10.1
BOOT: C12.2 MD1.25 R6.1 S2.3 S2.4 U2.13
EN: C8.2 MD1.3 R4.1 S1.3 S1.4 U2.14
GND: C3.2 C4.2 C5.2 C6.1 C7.1 C8.1 C9.1 C10.1 C11.1 C12.1 C13.1 C15.2 C16.2 C17.1 C18.2 C19.1 C20.1 C21.2 C22.1 C23.1 D3.1 D4.2 D5.2 D6.2 J1.5 J1.S J2.1 J3.1 J4.1 J5.1 J6.1 J7.1 MD1.1 MD1.15 MD1.38 MD1.39 P1.3 P2.6 P4.6 P5.6 P6.2 P7.2 R13.1 R19.1 R20.1 R21.1 R22.1 R23.1 R24.1 R25.1 R26.1 R27.2 R28.2 S1.1 S1.2 S2.1 S2.2 U2.1 U3.1 U3.4 U3.7 U3.10 U3.13 U4.1 U5.1 U6.4 U7.4
GREEN_INT: MD1.17 R12.1
NetC2_1: C2.1 R1.1 R14.2 U1.5
NetD1_1: D1.1 R3.1
NetD2_1: D2.1 R5.1
NetD4_1: D4.1 R10.2
NetD5_1: D5.1 R11.2
NetD6_1: D6.1 R12.2
NetD7_1: D7.1 Q1.3 S3.9
NetD8_1: D8.1 Q2.3 S4.9
NetD9_1: D9.1 J7.4
NetD10_1: D10.1 Q3.3 S5.9
NetD11_1: D11.1 Q4.3 S6.9
NetJ1_1: J1.1 R2.1
NetJ1_2: J1.2 U2.6
NetJ1_3: J1.3 U2.5
NetJ2_2: J2.2 S5.6
NetJ3_2: J3.2 S4.6
NetJ4_2: J4.2 S6.6
NetJ5_2: J5.2 S3.6
NetMD1_8: MD1.8 Q1.1 Q2.1
NetMD1_9: MD1.9 Q3.1 Q4.1
NetMD1_10: MD1.10
NetMD1_11: MD1.11
NetMD1_12: MD1.12
NetMD1_13: MD1.13
NetMD1_14: MD1.14
NetMD1_16: MD1.16 S4.10
NetMD1_24: MD1.24
NetMD1_26: MD1.26
NetMD1_27: MD1.27 U6.5
NetMD1_28: MD1.28 U7.5
NetMD1_29: MD1.29
NetMD1_30: MD1.30
NetMD1_33: MD1.33 P6.4 P7.1 R7.1
NetMD1_36: MD1.36 P6.3 P7.6 R8.1
NetMD1_37: MD1.37
NetP2_4: P2.4
NetP2_5: P2.5
NetP4_3: P4.3
NetP4_4: P4.4
NetP4_5: P4.5
NetP5_4: P5.4
NetP5_5: P5.5
NetQ1_2: Q1.2 R20.2
NetQ2_2: Q2.2 R22.2
NetQ3_2: Q3.2 R24.2
NetQ4_2: Q4.2 R26.2
NetR9_1: R9.1 R13.2 U3.5
NetR15_1: R15.1 U4.4
NetR16_1: R16.1 U4.3
NetR17_1: R17.1 U5.4
NetR18_1: R18.1 U5.3
NetS3_10: S3.10
NetS5_10: S5.10
NetS6_10: S6.10
NetU6_6: U6.6 U7.6
PGND: C1.1 C14.1 R14.1 U1.3 U1.6
RC_PWM_ESC: P1.1 S3.1 S4.1